# Altium PCB Power.PcbDoc
Units mm, origin at the board's own origin, x right, y up, seen from the top; angles counter-clockwise.
Board outline 75.56 x 45.97 mm, 2 copper layers (Top Layer, Bottom Layer), stack 1.671 mm thick; 23 components, 16 nets, 97 pads, 8 vias.
Unrouted connection lines stored in the file: 15.
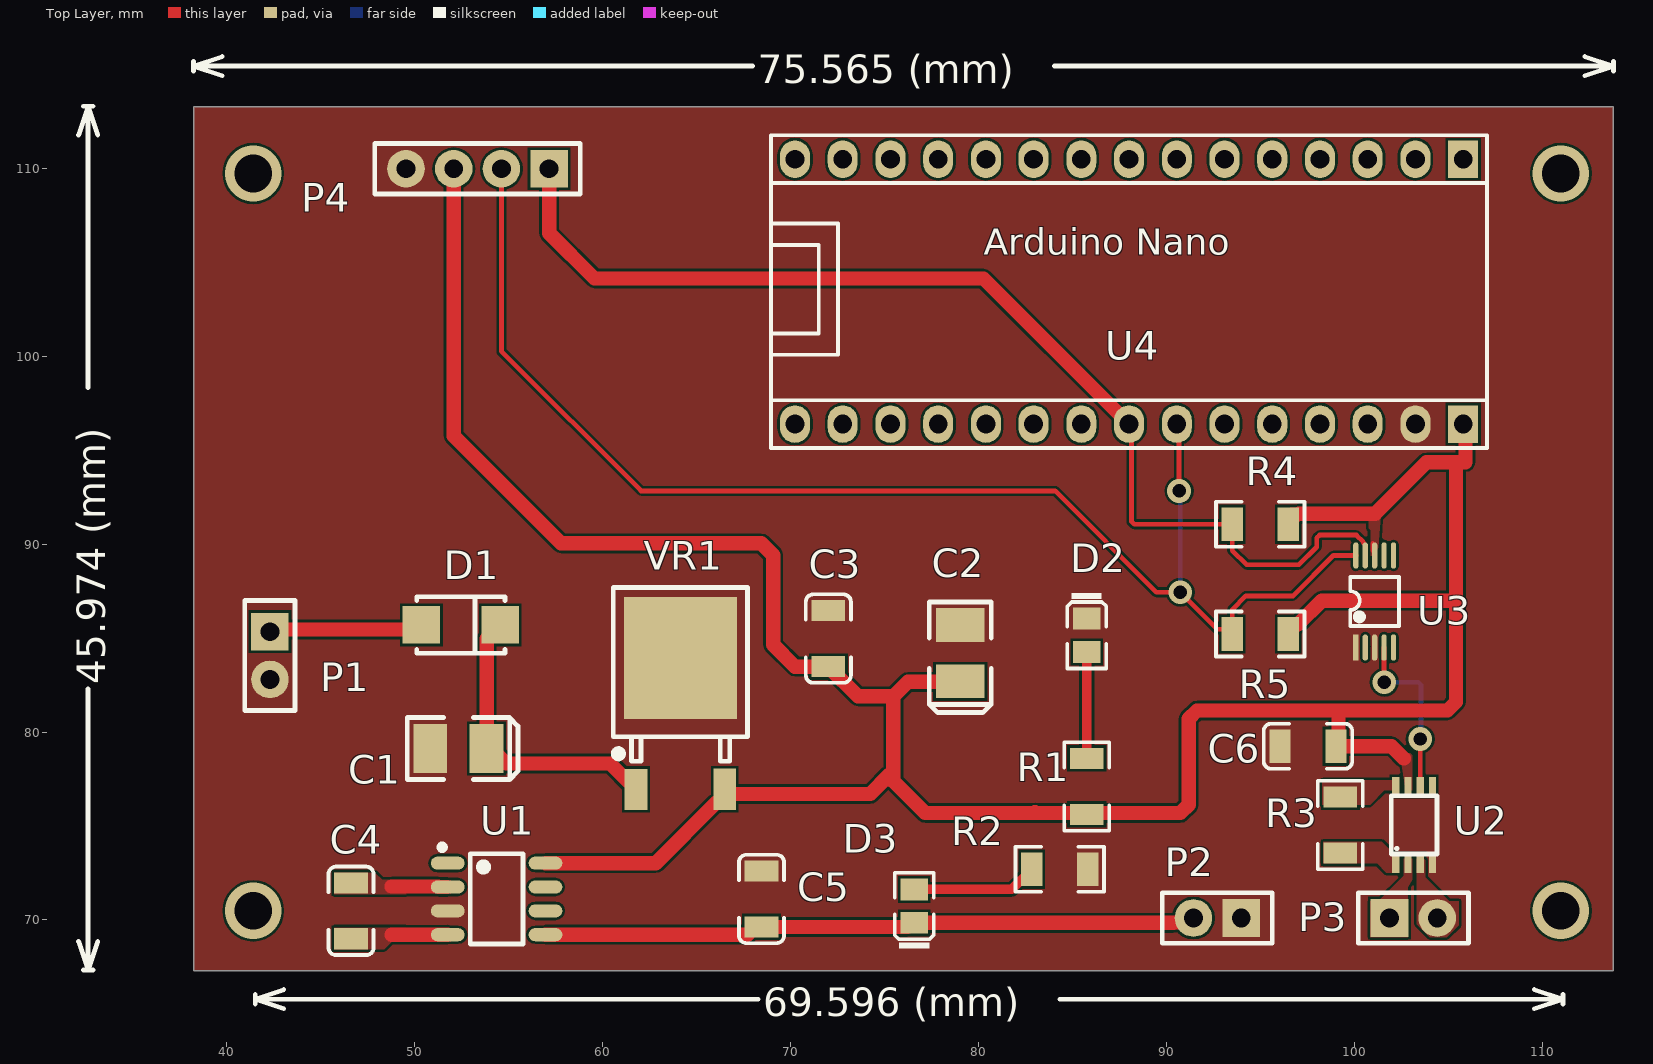
[diagram p0: Top Layer view]
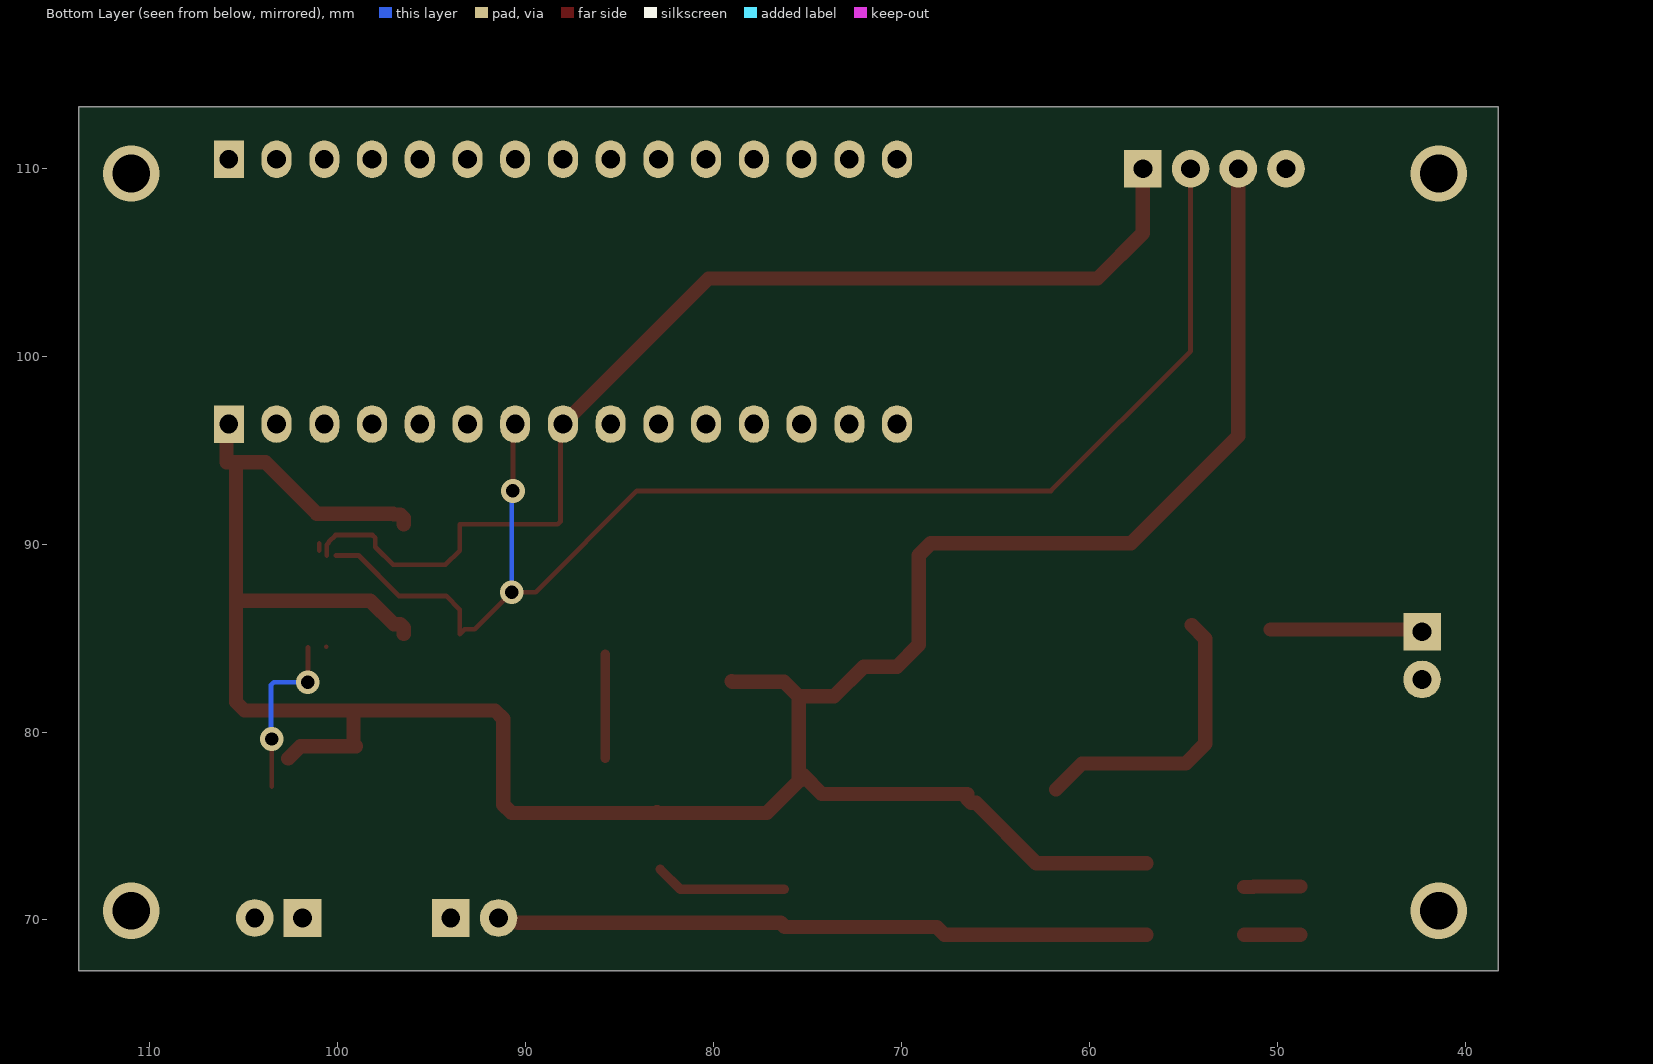
[diagram p1: Bottom Layer view, seen from below]
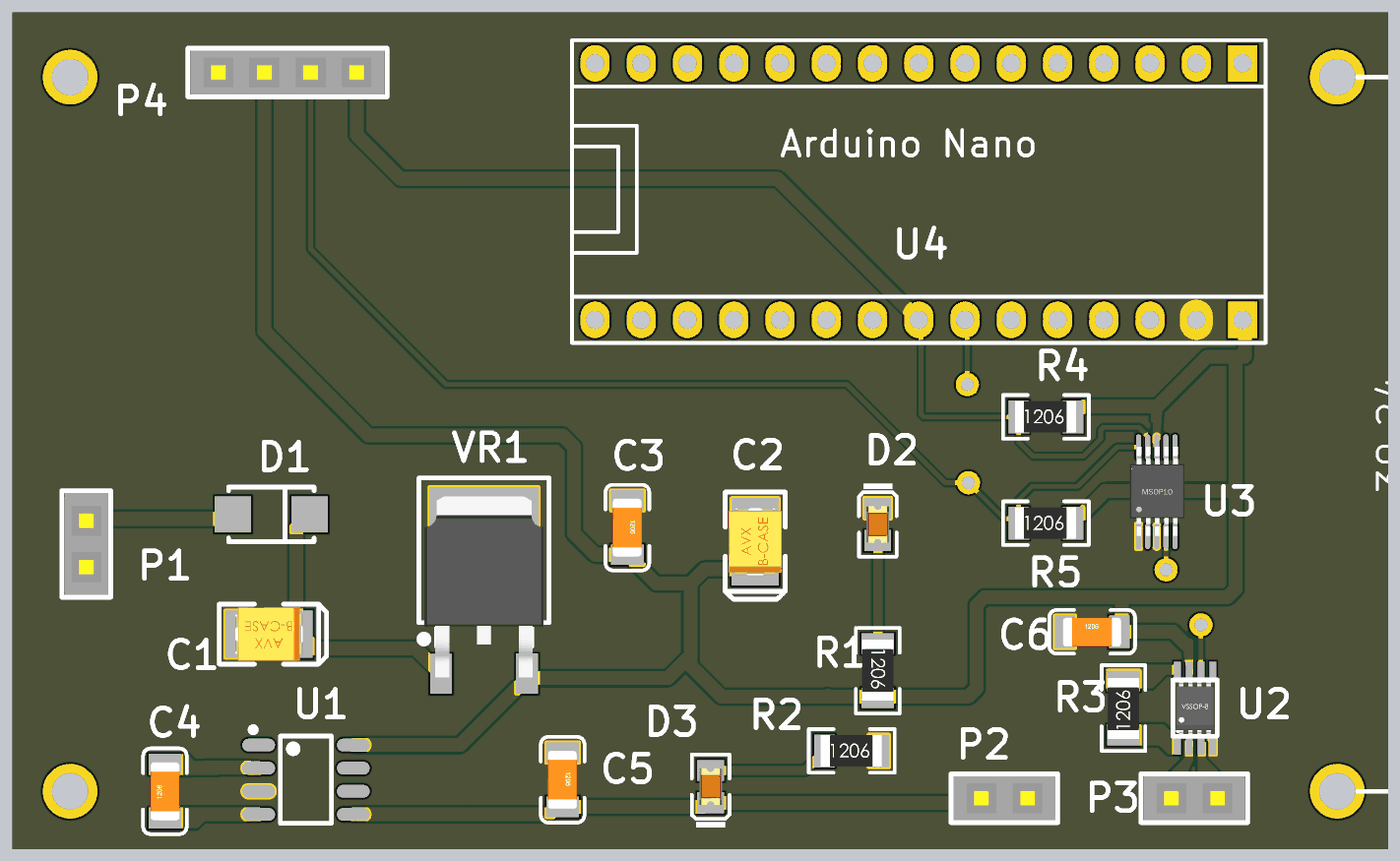
[diagram p2: 3D render of the assembled board from above, using the file's embedded part models]

## Layer stack, top to bottom
Top Solder: solder mask 0.0102, Solder Resist, Dk 3.5
Top Layer: signal copper 0.0356
Dielectric 1: dielectric 1.6, FR-4, Dk 4.8
Bottom Layer: signal copper 0.0356
Bottom Solder: solder mask 0.0102, Solder Resist, Dk 3.5

## Board outline
38.227,113.284 38.227,67.31 113.792,67.31 113.792,113.284

## Design rules (kind name [scope] priority, off if disabled: settings)
Clearance [All] p1: gap=0.127 ignorepadtopadclearanceinfootprint=FALSE
PlaneConnect [All] p1: planeconnectstyle=Direct reliefexpansion=0.508 reliefentries=4 reliefconductorwidth=0.254 reliefairgap=0.254
PolygonConnect [All] p1: connectstyle=Direct reliefconductorwidth=0.254 reliefentries=4 polygonreliefangle="90 Angle" airgapwidth=0.254
RoutingVias [All] p1: holewidth=0.711 width=1.27 viastyle="Through Hole" minholewidth=0.711 minwidth=1.27 maxholewidth=0.711 maxwidth=1.27
SolderMaskExpansion [All] p1: expansion=0.102 istentingtop=FALSE
Width [All] p1: maxlimit=2.54 minlimit=0.254 preferedwidth=0.254 minimp=50.000000 maximp=50.000000 favimp=50.000000
29 further rules are at their usual default settings.

## Components (designator, comment, footprint, x,y, rotation, side; value= is the part's Value field where it differs from the comment)
C1 "100uF (107) ±10% 6.3V" LC-CASE-B_3528 52.324,79.121 r0 top
C2 "100uF (107) ±10% 6.3V" LC-CASE-B_3528 79.028,84.201 r270 top
C3 "1uF (105) 10% 50V" LC-1206_C 72.009,84.974 r270 top
C4 "10uF (106) 10% 50V" LC-1206_C 46.609,70.485 r90 top
C5 "10uF (106) 10% 50V" LC-1206_C 68.453,71.12 r270 top
C6 "1uF (105) 10% 50V" LC-1206_C 97.536,79.248 r0 top
D1 "M7" LC-SMA(DO-214AC)_S1 52.451,85.701 r180 top
D2 "黄灯 0805" LC-0805_LED_S1 85.76,85.15 r270 top
D3 "黄灯 0805" LC-0805_LED_S1 76.581,70.739 r90 top
P1 "" Female1X2 42.291,84.074 r270 top
P2 "" Female1X2 92.71,70.104 r180 top
P3 "" Female1X2 103.143,70.104 r0 top
P4 "屏幕排座" Female1X4 53.34,109.982 r180 top
R1 "4.7KΩ (4701) ±1%" LC-1206_R 85.76,77.107 r270 top
R2 "4.7KΩ (4701) ±1%" LC-1206_R 84.328,72.701 r0 top
R3 "100Ω (1000) ±1%" LC-1206_R 99.256,75.057 r90 top
R4 "10KΩ (1002) ±1%" LC-1206_R 94.996,91.059 r0 top
R5 "10KΩ (1002) ±1%" LC-1206_R 94.996,85.217 r0 top
U1 "ICL7660AIBAZA-T" LC-SOIC-8_150mil 54.356,71.12 r270 top
U2 "INA333" VSSOP-8 103.184,75.057 r90 top
U3 "ADS1115" MSOP10 101.085,86.948 r90 top
U4 "Arduino Nano" PCBComponent_1 86.998,103.632 r0 top
VR1 "L78M05ABDT-TR" LC-TO-252-2-180 64.135,76.947 r90 top

## Footprints (in the part's own frame and the unit in brackets; to place one, negate y for a bottom-side part, rotate by r counter-clockwise, add the part's x,y. Pads: shape width x height; smd on the part's side, far side on the other; paste and mask are expansions set on the pad)
Female1X2 [mm]
  rect 2x2 hole 1: 1(-1.27,0)
  round 2 hole 1: 2(1.27,0)
  silkscreen extent -2.93,-1.34 2.93,1.34, body extent -2.79,-1.21 2.79,1.21, height 8.51
Female1X4 [mm]
  rect 2x2 hole 1: 1(-3.81,0)
  round 2 hole 1: 2(-1.27,0) 3(1.27,0) 4(3.81,0)
  silkscreen extent -5.47,-1.34 5.47,1.34, body extent -5.33,-1.21 5.33,1.21, height 8.51
LC-0805_LED_S1 [mm]
  rect 1.16x1.47 smd: A(0.89,0) K(-0.89,0)
  silkscreen extent -2.25,-1.04 1.77,1.03, body extent -1.01,-0.62 1.01,0.62, height 1.1
LC-1206_C [mm]
  rect 1.13x1.8 smd: 1(-1.49,0) 2(1.49,0)
  silkscreen extent -2.36,-1.2 2.35,1.2, body extent -1.6,-0.81 1.6,0.79, height 1
LC-1206_R [mm]
  rect 1.13x1.8 smd: 1(-1.49,0) 2(1.49,0)
  silkscreen extent -2.36,-1.2 2.35,1.2, body extent -1.7,-0.86 1.65,0.87, height 0.85
LC-CASE-B_3528 [mm]
  rect 1.8x2.6 smd: 1(1.5,0) 2(-1.5,0)
  silkscreen extent -2.73,-1.65 3.16,1.65, body extent -1.85,-1.47 1.85,1.46, height 2.03
LC-SMA(DO-214AC)_S1 [mm]
  rect 2x2 smd: 1(2.1,0) 2(-2.1,0)
  silkscreen extent -2.35,-1.5 2.35,1.5
LC-SOIC-8_150mil [mm]
  oval 0.7x1.8 smd: 1(-1.905,-2.6) 2(-0.635,-2.6) 3(0.635,-2.6) 4(1.905,-2.6) 5(1.905,2.6) 6(0.635,2.6) 7(-0.635,2.6) 8(-1.905,2.6)
  silkscreen extent -2.9,-3.05 2.4,1.4
LC-TO-252-2-180 [mm] "180度编带包装"
  rect 2.2x1.2 smd: 1(0,2.361) 3(0.004,-2.361)
  rect 6.5x6 smd: 2(7,0)
  silkscreen extent 1.5,-3.57 10.75,3.57, body extent -0.2,-3.27 9.74,3.27, height 2.44
MSOP10 [mm]
  rect 1.4x0.28 smd: 1(-2.45,1)
  oval 1.4x0.28 smd: 2(-2.45,0.5) 3(-2.45,0) 4(-2.45,-0.5) 5(-2.45,-1) 6(2.45,-1) 7(2.45,-0.5) 8(2.45,0) 9(2.45,0.5) 10(2.45,1)
  silkscreen extent -1.3,-1.3 1.3,1.3, body extent -2.42,-1.52 2.48,1.48, height 0.95
PCBComponent_1 [mm]
  rect 1.6x2 hole 1: 1(18.796,6.858) 30(18.796,-7.239)
  oval 1.6x2 hole 1: 2(16.256,6.858) 3(13.716,6.858) 4(11.176,6.858) 5(8.636,6.858) 6(6.096,6.858) 7(3.556,6.858) 8(1.016,6.858) 9(-1.524,6.858) 10(-4.064,6.858) 11(-6.604,6.858) 12(-9.144,6.858) 13(-11.684,6.858) 14(-14.224,6.858) 15(-16.764,6.858) 16(-16.764,-7.239) 17(-14.224,-7.239) 18(-11.684,-7.239) 19(-9.144,-7.239) 20(-6.604,-7.239) 21(-4.064,-7.239) 22(-1.524,-7.239) 23(1.016,-7.239) 24(3.556,-7.239) 25(6.096,-7.239) 26(8.636,-7.239) 27(11.176,-7.239) 28(13.716,-7.239) 29(16.256,-7.239)
  silkscreen extent -18.03,-8.51 20.07,8.13
VSSOP-8 [mm]
  rect 1x0.38 smd: 1(-2.05,0.975) 2(-2.05,0.325) 3(-2.05,-0.325) 4(-2.05,-0.975) 5(2.05,-0.975) 6(2.05,-0.325) 7(2.05,0.325) 8(2.05,0.975)
  silkscreen extent -1.55,-1.22 1.55,1.22, body extent -1.6,-1.05 1.6,1.05, height 0.9

## Part data
C1 C2: library part "3528 100uF (107) 10% 6.3V", "钽电容", Package=3528, SuppliersPartNumber=C16133, ComponentLink1Description=供应商链接, ComponentLink1URL=http://www.szlcsc.com/product/details_16815.html, Supplier=LC
C3 C6: library part "1206 1uF (105) 10% 50V", "贴片电容", Package=1206, SuppliersPartNumber=C1848, ComponentLink1Description=供应商链接, ComponentLink1URL=http://www.szlcsc.com/product/details_2200.html, Supplier=LC
C4 C5: library part "1206 10uF (106) 10% 50V", "贴片电容", Package=1206, SuppliersPartNumber=C13585, ComponentLink1Description=供应商链接, ComponentLink1URL=http://www.szlcsc.com/product/details_14236.html, Supplier=LC
D1: library part "SMA(DO-214AC) M7", "二极管", Package=SMA(DO-214AC), SuppliersPartNumber=C2464, ComponentLink1Description=供应商链接, ComponentLink1URL=http://www.szlcsc.com/product/details_2841.html, Supplier=LC
D2 D3: library part "0805 黄灯", "发光二极管", Package=0805, SuppliersPartNumber=C2296, ComponentLink1Description=供应商链接, ComponentLink1URL=http://www.szlcsc.com/product/details_2669.html, Supplier=LC
P1 P2 P3: library part 排座与排针1X2
P4: library part 排座与排针1X4
R1 R2: library part "1206 4.7KΩ (4701) 1%", "贴片电阻", Package=1206, SuppliersPartNumber=C17936, ComponentLink1Description=供应商链接, ComponentLink1URL=http://www.szlcsc.com/product/details_18624.html, Supplier=LC
R3: library part "1206 100Ω (1000) 1%", "贴片电阻", Package=1206, SuppliersPartNumber=C17901, ComponentLink1Description=供应商链接, ComponentLink1URL=http://www.szlcsc.com/product/details_18589.html, Supplier=LC
R4 R5: library part "1206 10KΩ (1002) 1%", "贴片电阻", Package=1206, SuppliersPartNumber=C17902, ComponentLink1Description=供应商链接, ComponentLink1URL=http://www.szlcsc.com/product/details_18590.html, Supplier=LC
U1: "电源芯片", Package=SOIC-8_150mil, SuppliersPartNumber=C7881, ComponentLink1Description=供应商链接, ComponentLink1URL=http://www.szlcsc.com/product/details_8358.html, Supplier=LC
U2: "仪用放大器"
U4: library part Component_1_1
VR1: library part "TO-252-2 L78M05ABDT-TR", "低压差线性稳压(LDO)", Package=TO-252-2, SuppliersPartNumber=C58069, ComponentLink1Description=供应商链接, ComponentLink1URL=http://www.szlcsc.com/product/details_59107.html, Supplier=LC

## Via types
v1: diameter 1.27, hole 0.711, Top Layer to Bottom Layer, 4 vias
v2: diameter 3, hole 2, Top Layer to Bottom Layer, 4 vias

## Nets (pads, with @x,y where several pads share a name; then routed paths per layer and width w, separated by ;. In a path a pad name is that pad's centre, name@x,y a point inside that pad or via, vN(x,y) a via of type N, cw(c..) or ccw(c..) an arc to the next point about the centre after c; other vN are vias at no path point)
ACsignal: U2.6 U3.4 | length 9.8
  Top Layer w0.254: U3.4 101.585,82.666 v1(101.597,82.654) ; U2.6 v1(103.509,79.629)
  Bottom Layer w0.254: v1(101.597,82.654) 103.407,82.654 103.556,82.505 103.556,80.04 103.145,79.629 v1(103.509,79.629)
GND: C1.2 C2.2 C3.1 C5.1 C6.1 D2.K P1.2 P2.1 P4.4 R2.2 U1.3 U2.4 U3.1 U3.3 U4.29 VR1.2 | length 0.5
  Top Layer w0.762: P2.1 P2.1@94.362,70.486
NanoPOWER: C2.1 C3.2 C6.2 P4.3 R1.2 R4.2 R5.2 U1.8 U2.7 U3.8 U4.30 VR1.3 | length 152.8
  Top Layer w0.254: U3.8@100.979,89.661 U3.8@100.979,90.034
  Top Layer w0.762: P4.3 52.07,95.758 57.785,90.043 68.441,90.043 69.076,89.408 69.076,84.642 70.234,83.484 C3.2 73.59,81.903 75.472,81.903 ; U1.8 62.82,73.025 66.027,76.232 66.277,76.232 66.496,76.451 66.496,76.701 74.234,76.701 75.257,77.724 75.472,77.724 ; C2.1 79.004,82.677 76.246,82.677 75.472,81.903 ; R5.2 96.486,85.552 96.67,85.736 97.005,85.736 98.264,86.995 105.41,86.995 ; R4.2 96.486,91.394 96.67,91.578 97.005,91.578 97.055,91.628 101.111,91.628 103.844,94.361 105.41,94.361 ; 102.635,78.597 101.984,79.248 C6.2 99.161,79.383 99.161,81.153 ; U4.30@105.918,96.393 105.918,94.361 105.41,94.361 ; 75.472,77.724 75.472,77.389 77.169,75.692 82.977,75.692 83.011,75.726 83.045,75.692 90.74,75.692 91.186,76.138 91.186,80.707 91.632,81.153 99.161,81.153 ; 75.472,77.724 75.472,81.903 ; 99.161,81.153 104.964,81.153 105.41,81.599 105.41,86.995 ; 105.41,86.995 105.41,94.361
NetC1_1: C1.1 D1.2 VR1.1 | length 15.6
  Top Layer w0.762: D1.2 53.824,84.974 53.824,79.375 54.87,78.329 60.392,78.329 VR1.1
NetC4_1: C4.1 U1.4 | length 3
  Top Layer w0.762: 48.768,69.214 U1.4
NetC4_2: C4.2 U1.2 | length 3
  Top Layer w0.762: 48.771,71.786 51.237,71.786 51.268,71.755 U1.2
NetC5_2: C5.2 D3.K P2.2 U1.5 | length 34.9
  Top Layer w0.762: U1.5 67.703,69.215 68.118,69.63 C5.2 76.207,69.63 76.426,69.849 D3.K 90.375,69.849 90.393,69.867 91.203,69.867 P2.2
NetD1_1: D1.1 P1.1 | length 8.1
  Top Layer w0.762: P1.1@42.291,85.459 D1.1@50.351,85.459
NetD2_A: D2.A R1.1 | length 5.5
  Top Layer w0.508: R1.1 D2.A@85.76,84.129
NetD3_A: D3.A R2.1 | length 7
  Top Layer w0.508: D3.A@76.245,71.629 D3.A 81.766,71.629 R2.1
NetP3_1: P3.1 U2.2
NetP3_2: P3.2 U2.3
NetR3_1: R3.1 U2.1
NetR3_2: R3.2 U2.8
screenSCL: P4.2 R5.1 U3.10 U4.24 | length 73.4
  Top Layer w0.254: P4.2 54.61,100.271 62.044,92.837 84.074,92.837 89.47,87.441 v1(90.74,87.441) 92.709,85.472 93.251,85.472 R5.1 93.506,86.521 94.234,87.249 96.739,87.249 98.888,89.398 U3.10 ; U4.24@90.678,96.393 v1(90.678,92.837) v1@91.058,92.457
  Bottom Layer w0.254: v1(90.678,92.837) 90.74,92.775 v1(90.74,87.441)
screenSDA: P4.1 R4.1 U3.9 U4.23 | length 60
  Top Layer w0.254: U4.23@88.138,96.755 88.138,91.208 88.287,91.059 R4.1 93.506,89.661 94.267,88.9 97.055,88.9 98.005,89.85 98.005,90.334 98.154,90.483 100.117,90.483 100.479,90.121 100.479,90.071 100.585,89.965 U3.9
  Top Layer w0.762: P4.1 57.15,106.553 59.563,104.14 80.267,104.14 U4.23
pads on no net: U1.1 U1.6 U1.7 U2.5 U3.2 U3.5 U3.6 U3.7 U4.1 U4.2 U4.3 U4.4 U4.5 U4.6 U4.7 U4.8 U4.9 U4.10 U4.11 U4.12 U4.13 U4.14 U4.15 U4.16 U4.17 U4.18 U4.19 U4.20 U4.21 U4.22 U4.25 U4.26 U4.27 U4.28
copper on no net: | length 0
  Top Layer w0.254: 100.606,84.54 100.611,84.545
  other v2: 41.402,70.485 110.998,70.485 41.402,109.728 110.998,109.728

## Polygon pours and split planes (outlines as drawn)
GND on Top Layer "GND_L01_P048" (solid, remove dead copper, pour order 48): 38.227,113.284 38.227,67.31 113.792,67.31 113.792,113.284
NanoPOWER on Top Layer "NANOPOWER_L01_P045" (solid, remove dead copper, pour order 45): 102.433,78.867 102.749,76.894 103.077,76.894 103.077,78.867
NetR3_2 on Top Layer "NETR3_2_L01_P039" (solid, remove dead copper, pour order 39): 102.348,77.44 98.352,77.44 98.298,77.385 98.298,76.138 100.838,76.138 101.594,76.894 102.348,76.894
NetP3_2 on Top Layer "NETP3_2_L01_P044" (solid, pour order 44): 103.334,73.265 103.334,69.771 104.016,69.088 104.922,69.088 105.556,69.722 105.556,70.993 105.049,70.993 103.778,72.264 103.778,73.265
NetP3_1 on Top Layer "NETP3_1_L01_P043" (solid, pour order 43): 102.635,73.265 103.077,73.265 103.077,72.136 102.856,71.755 102.856,69.088 100.857,69.088 100.857,70.993 101.287,70.993 102.635,72.341
NanoPOWER on Top Layer "NANOPOWER_L01_P042" (solid, pour order 42): 100.765,91.628 100.765,90.838 100.864,90.739 100.864,89.398 101.085,89.398 101.278,89.85 101.405,91.628
no net on Top Layer "NONET_L01_P041" (solid, pour order 41): 99.689,91.694
NetR3_1 on Top Layer "NETR3_1_L01_P040" (solid, pour order 40): 98.352,74.168 98.352,73.007 101.222,73.007 101.712,72.517 102.348,72.517 102.348,73.265 102.362,73.279 101.473,74.168
no net on Top Layer "NONET_L01_P034" (solid, pour order 34): 99.811,89.154
no net on Top Layer "NONET_L01_P031" (solid, pour order 31): 89.154,74.93
no net on Top Layer "NONET_L01_P030" (solid, pour order 30): 88.9,74.93
NetC4_1 on Top Layer "NETC4_1_L01_P024" (solid, pour order 24): 45.721,69.596 45.721,68.453 48.387,68.453 48.768,68.834 49.53,68.834 49.53,69.595 49.529,69.596
NetC4_2 on Top Layer "NETC4_2_L01_P022" (solid, pour order 22): 49.504,72.136 48.26,72.136 47.879,72.517 45.72,72.517 45.72,71.373 49.534,71.374
no net on Top Layer "Top Layer-No Net 1" (solid, pour order 4): 89.281,74.549

## Silkscreen, mask and mechanical layers (free items; w line width, h text height)
Top Overlay:
  lines w0.254: 32.106,68.857 32.614,67.333 ; 32.106,111.783 32.614,113.307 ; 32.36,67.333 32.868,67.333 ; 32.36,113.307 32.868,113.307 ; 32.614,82.296 32.614,67.333 ; 32.614,98.344 32.614,113.307 ; 33.122,68.857 32.614,67.333 ; 33.122,111.783 32.614,113.307 ; 38.227,115.189 38.227,115.697 ; 39.751,114.935 38.227,115.443 ; 39.751,115.951 38.227,115.443 ; 41.506,65.532 41.506,66.04 ; 43.03,65.278 41.506,65.786 ; 43.03,66.294 41.506,65.786 ; 67.986,115.443 38.227,115.443 ; 68.28,65.786 41.506,65.786 ; 84.033,115.443 113.792,115.443 ; 84.328,65.786 111.102,65.786 ; 109.578,65.278 111.102,65.786 ; 109.578,66.294 111.102,65.786 ; 111.102,65.532 111.102,66.04 ; 112.268,114.935 113.792,115.443 ; 112.268,115.951 113.792,115.443 ; 113.792,115.189 113.792,115.697
  text "75.565 (mm)" at 68.24,114.529 h1.52
  text "45.974 (mm)" at 33.528,82.55 h1.52 r90
  text "69.596 (mm)" at 68.534,64.872 h1.52
Mechanical 1:
  the board outline again, w0.254

## Dimensions
110.998,109.728 to 110.998,70.485 on Top Overlay